# Altium PCB Pixel1.0_3.PcbDoc
Units mm, origin at the board's own origin, x right, y up, seen from the top; angles counter-clockwise.
Board outline 20.31 x 15.2 mm, 2 copper layers (Top, Bottom), stack 1.025 mm thick; 29 components, 19 nets, 125 pads, 25 vias.
Unrouted connection lines stored in the file: 1.
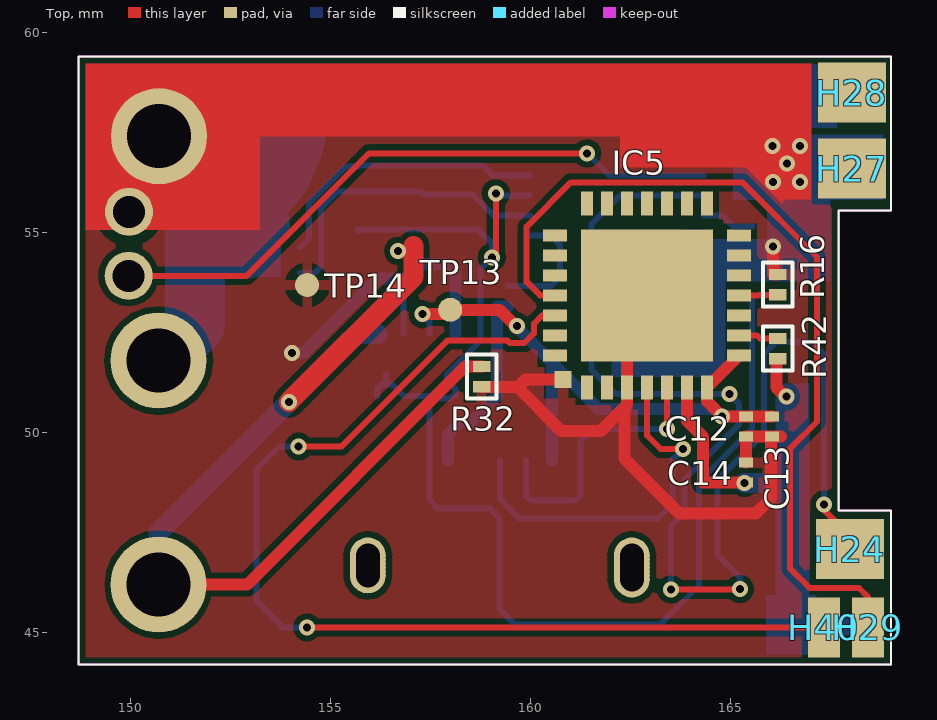
[diagram p0: Top view]
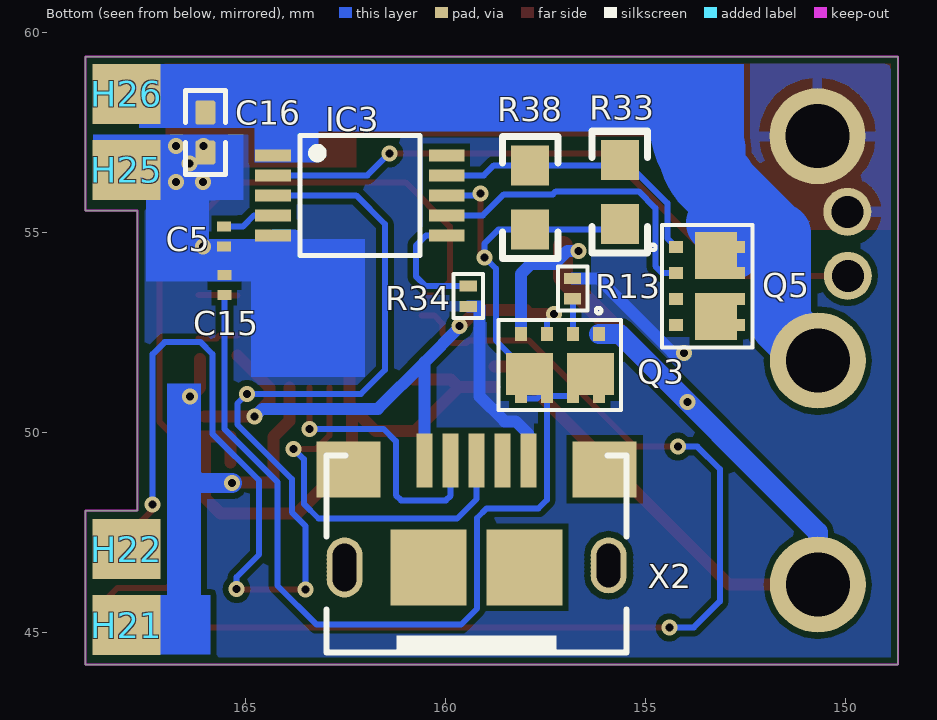
[diagram p1: Bottom view, seen from below]
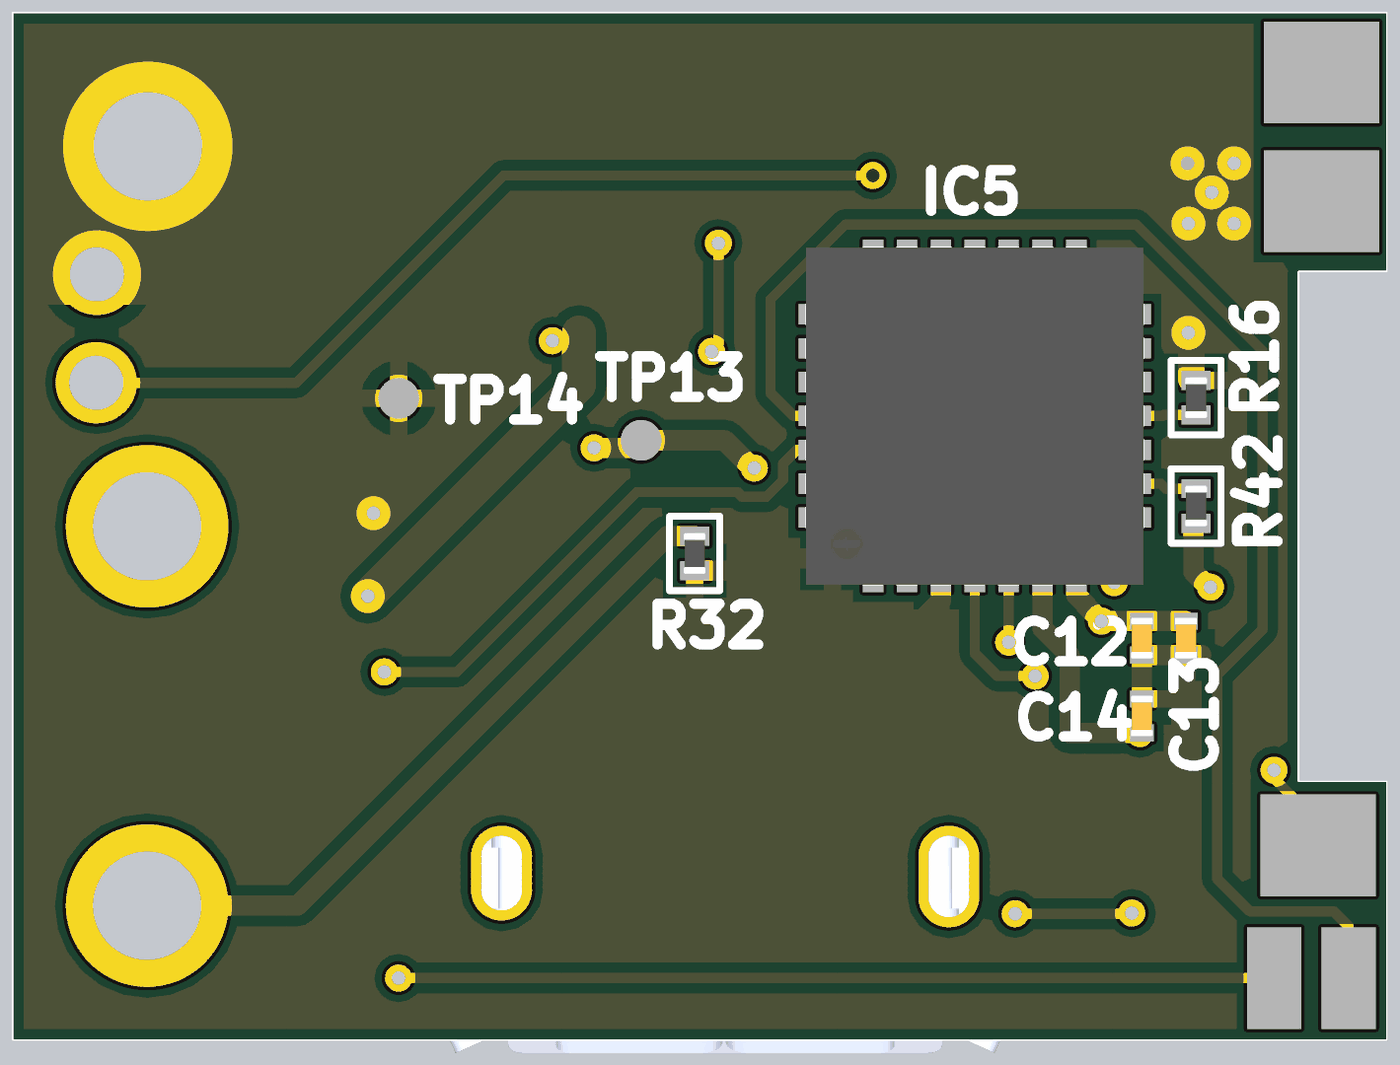
[diagram p2: 3D render of the assembled board from above, using the file's embedded part models]
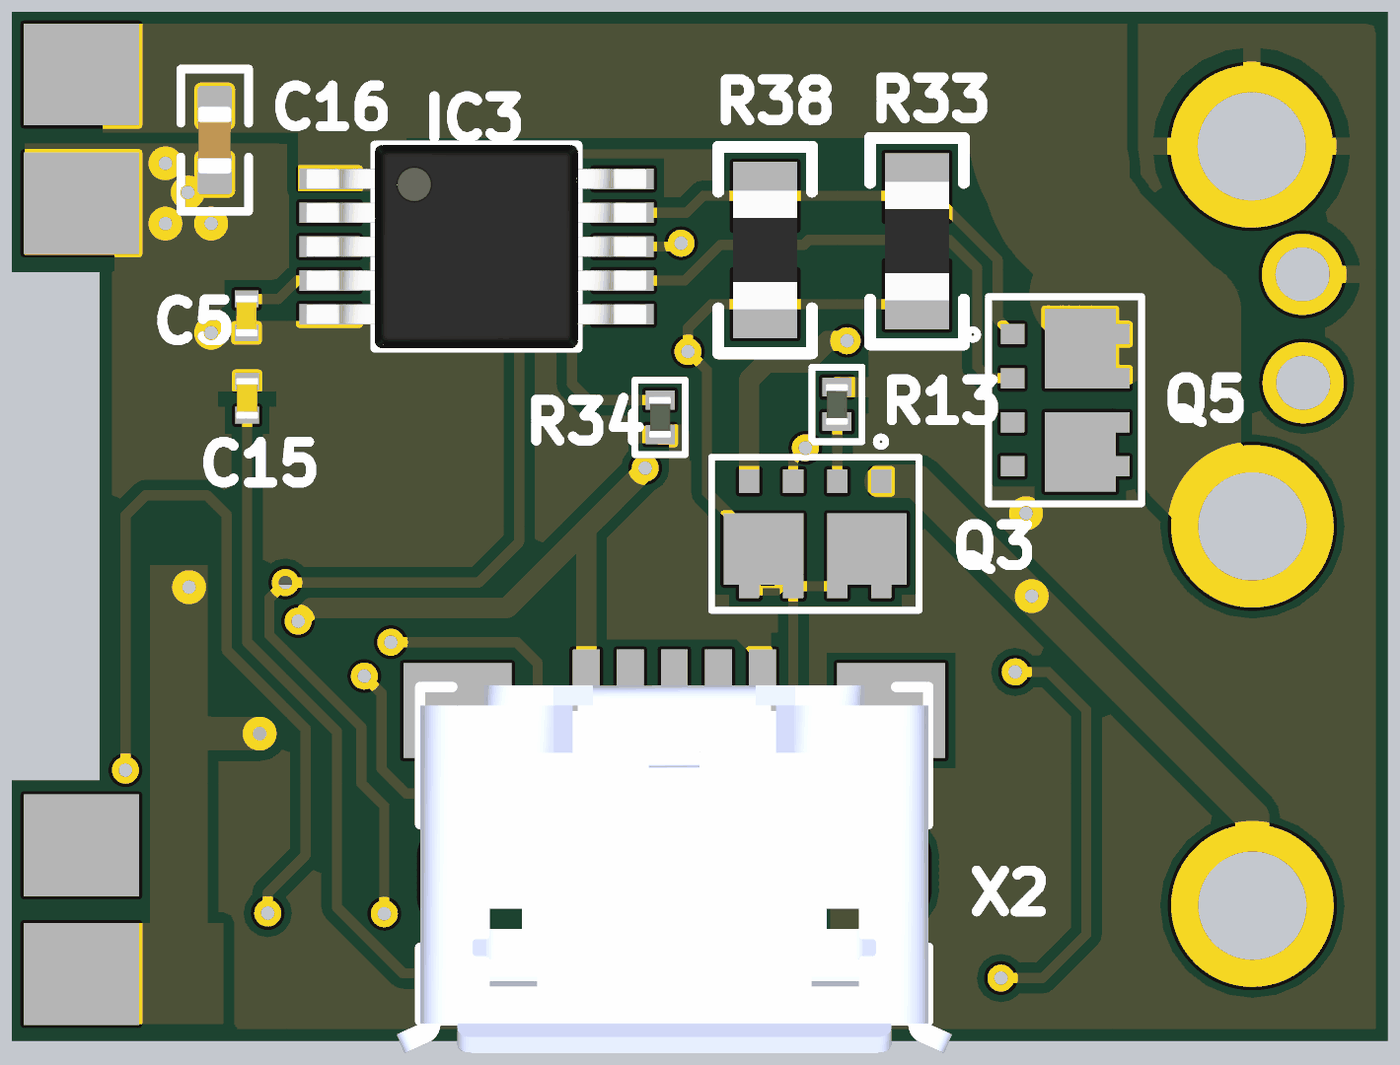
[diagram p3: 3D render of the assembled board from below, using the file's embedded part models]

## Layer stack, top to bottom
Top Solder: solder mask 0.0102, Solder Resist, Dk 3.5
Top: signal copper 0.0356
Dielectric 1: core 0.954, FR-4, Dk 4.2
Bottom: signal copper 0.0356
Bottom Solder: solder mask 0.0102, Solder Resist, Dk 3.5

## Board outline
148.7,44.2 148.7,59.4 169.01,59.4 169.01,55.55 167.71,55.55 167.71,48.05 169.01,48.05 169.01,44.2

## Design rules (kind name [scope] priority, off if disabled: settings)
Clearance [All] p1: gap=0.15
ComponentClearance [All] p1 off: gap=0.2 collisioncheckmode=3 verticalgap=0.15 showdistances=FALSE
HoleSize [All] p1: absolutevalues=TRUE maxlimit=5 minlimit=0.025 maxpercent=80.000 minpercent=20.000
HoleToHoleClearance mdViaViaSameLayer [All] p1: gap=0 allowstackedmicrovias=TRUE
HoleToHoleClearance [All] p2: gap=0 allowstackedmicrovias=TRUE
MinimumSolderMaskSliver [All] p1 off: minsoldermaskwidth=0.254
PolygonConnect ThermalVias [IsVia] p1: connectstyle=Direct reliefconductorwidth=0.254 reliefentries=4 polygonreliefangle="90 Angle" airgapwidth=0.254
PolygonConnect [All] p2: connectstyle=Relief reliefconductorwidth=0.254 reliefentries=4 polygonreliefangle="90 Angle" airgapwidth=0.254
RoutingVias [All] p1: holewidth=0.2 width=0.4 viastyle="Through Hole" minholewidth=0.2 minwidth=0.4 maxholewidth=3 maxwidth=5
ShortCircuit [All] p1 off: allowed=FALSE
SilkToBoardRegionClearance [All] p1 off:
SilkToSilkClearance [All] p1 off: silktosilkclearance=0.254
SilkToSolderMaskClearance [IsPad] p1 off: minsilkscreentomaskgap=0.254 clearancetoexposedcopper=TRUE
SolderMaskExpansion via [isvia] p1: expansion=0 soldermaskfromhole=TRUE
SolderMaskExpansion [All] p2: expansion=0.05
Width Width_2 [InNet('BAT+')] p1: maxlimit=5 minlimit=0.1 preferedwidth=0.3
Width Width_1 [InNet('GND')] p2: maxlimit=5 minlimit=0.1 preferedwidth=0.3
Width [All] p3: maxlimit=5 minlimit=0.1 preferedwidth=0.15
22 further rules are at their usual default settings.

## Classes and differential pairs
component class Pixel1.0_1: C5 C12 C13 C14 C15 C16 IC3 IC5 Q3 Q5 R13 R16 R32 R33 R34 R38 R42 TP13 X2
component class Pixel1.0_2: H21 H22 H24 H25 H26 H27 H28 H29 H40 TP14

## Components (designator, comment, footprint, x,y, rotation, side; value= is the part's Value field where it differs from the comment)
C5 "0.1uF" C0201 165.543,54.908 r270 bottom
C12 "1uF" C0201 165.38,50.15 r270 top
C13 "0.1uF" C0201 166.03,50.15 r270 top
C14 "0.1uF" C0201 165.38,49 r90 top
C15 "1u" C0201 165.534,53.691 r90 bottom
C16 "10u" C0402 166.012,57.503 r270 bottom
H21 "MOUNT-PAD-ROUNDTMOUNT1" T-MOUNT1 167.98,45.19 r270 bottom
H22 "MOUNT-PAD-ROUNDTMOUNT1" T-MOUNT1 167.98,47.09 r90 bottom
H24 "MOUNT-PAD-ROUNDTMOUNT1" T-MOUNT1 167.98,47.09 r90 top
H25 "MOUNT-PAD-ROUNDTMOUNT1" T-MOUNT1 167.98,56.57 r270 bottom
H26 "MOUNT-PAD-ROUNDTMOUNT1" T-MOUNT1 167.98,58.47 r90 bottom
H27 "MOUNT-PAD-ROUNDTMOUNT1" T-MOUNT1 168.03,56.6 r90 top
H28 "MOUNT-PAD-ROUNDTMOUNT1" T-MOUNT1 168.03,58.5 r90 top
H29 "MOUNT-PAD-ROUND1.5MMX1MM" TMOUNT4 168.43,45.13 r90 top
H40 "MOUNT-PAD-ROUND1.5MMX1MM" TMOUNT4 167.33,45.13 r90 top
IC3 "LTC4050" MSOP10 162.15,55.93 r270 bottom
IC5 "CP2102" MLP28 162.913,53.43 r90 top
Q3 "SI5999" 1206-8CHIP-FET 157.15,51.69 r0 bottom
Q5 "SI5999" 1206-8CHIP-FET 153.464,53.661 r270 bottom
R13 "100K" R0201 156.83,53.6 r270 bottom
R16 "10K" R0201 166.18,53.7 r90 top
R32 "100K" R0201 158.78,51.4 r90 top
R33 "0.1Ohm_0.4W" R0603 155.65,56.01 r270 bottom
R34 "19.6K" R0201 159.44,53.41 r90 bottom
R38 "0.1Ohm_0.4W" R0603 157.89,55.88 r270 bottom
R42 "4.7K" R0201 166.18,52.1 r90 top
TP13 "TPTP06R" TP06R 157.99,53.07 r315 top
TP14 "TPTP06R" TP06R 154.413,53.69 r90 top
X2 "MICROUSB-BW/MOUNTHOLE" MICRO_USB_B 159.23,46.63 r180 bottom locked

## Footprints (in the part's own frame and the unit in brackets; to place one, negate y for a bottom-side part, rotate by r counter-clockwise, add the part's x,y. Pads: shape width x height; smd on the part's side, far side on the other; paste and mask are expansions set on the pad)
1206-8CHIP-FET [mm] "1206-8CHIP-FET"
  rect 0.3x0.35 smd: 1(-0.975,-0.775) 2(-0.325,-0.775) 3(0.325,-0.775) 4(0.975,-0.775) 56(0.325,0.775) 56(0.975,0.775) 78(-0.975,0.775) 78(-0.325,0.775)
  rect 1.175x1.05 smd: 56(0.763,0.225) 78(-0.763,0.225)
  silkscreen extent -1.53,-1.43 1.53,1.13, body extent -1.39,-0.82 1.39,0.83, height 0.85
C0201 [mm] "C0201"
  rect 0.25x0.35 smd: 1(-0.25,0) 2(0.25,0)
  body extent -0.36,-0.16 0.36,0.16, height 0.31
C0402 [mm] "C0402"
  round 0.2 on Mech15: 0(0,0)
  rrect20% 0.6x0.5 smd: 1(-0.5,0) 2(0.5,0)
  silkscreen extent -1.05,-0.5 1.05,0.5, body extent -0.5,-0.25 0.5,0.25, height 0.5
MICRO_USB_B [mm] "MICRO_USB_B"
  rect 0.4x1.35 smd: P$1(-1.3,2.675) P$2(-0.65,2.675) P$3(0,2.675) P$4(0.65,2.675) P$5(1.3,2.675)
  rect 1.6x1.4 smd: P$6(-3.2,2.45) P$6(3.2,2.45)
  rect 1.9x1.9 smd: P$7(-1.2,0) P$7(1.2,0)
  round 0.9 hole 0.6: P$8(-3.3,0.3) P$9(-3.3,-0.3) P$12(-3.3,0) P$13(3.3,0) P$14(-3.3,0.2) P$15(-3.3,0.1) P$16(-3.3,-0.1) P$17(-3.3,-0.2) P$18(3.3,0.3) P$19(3.3,0.2) P$20(3.3,0.1) P$21(3.3,-0.2) P$22(3.3,-0.1)
  silkscreen extent -3.75,-2.2 3.75,2.8, body extent -4.1,-2.6 4.1,2.83, height 2.72
MLP28 [mm] "MLP28"
  rect 0.6x0.3 smd: 1(-2.3,1.5) 2(-2.3,1) 3(-2.3,0.5) 4(-2.3,0) 5(-2.3,-0.5) 6(-2.3,-1) 7(-2.3,-1.5) 15(2.3,-1.5) 16(2.3,-1) 17(2.3,-0.5) 18(2.3,0) 19(2.3,0.5) 20(2.3,1) 21(2.3,1.5)
  rect 0.3x0.6 smd: 8(-1.5,-2.3) 9(-1,-2.3) 10(-0.5,-2.3) 11(0,-2.3) 12(0.5,-2.3) 13(1,-2.3) 14(1.5,-2.3) 22(1.5,2.3) 23(1,2.3) 24(0.5,2.3) 25(0,2.3) 26(-0.5,2.3) 27(-1,2.3) 28(-1.5,2.3)
  rect 3.3x3.3 smd: EXP(0,0)
  rect 0.435x0.435 smd: M(-2.103,2.103)
  body extent -2.5,-2.5 2.5,2.5, height 1
MSOP10 [mm] "MSOP10"
  rect 0.305x0.889 smd: 1(-1,-2.17) 2(-0.5,-2.17) 3(0,-2.17) 4(0.5,-2.17) 5(1,-2.17) 6(1,2.17) 7(0.5,2.17) 8(0,2.17) 9(-0.5,2.17) 10(-1,2.17)
  silkscreen extent -1.5,-1.5 1.5,1.5, body extent -1.5,-2.51 1.5,2.51, height 1.05
R0201 [mm] "R0201"
  rect 0.28x0.43 smd: 1(-0.255,0) 2(0.255,0)
  silkscreen extent -0.55,-0.37 0.55,0.37, body extent -0.32,-0.16 0.33,0.16, height 0.24
R0603 [mm] "0603 from SM-752 data"
  rect 1x0.95 smd: 1(-0.8,0) 2(0.8,0)
  silkscreen extent -1.52,-0.69 1.52,0.69, body extent -0.87,-0.47 0.88,0.48, height 0.54
T-MOUNT1 [mm] "T-MOUNT1"
  rect 1.5x1.7 smd: 1(0,0)
TMOUNT4 [mil] "TMOUNT4"
  rect 59.06x31.5 smd: 1(0,0)
TP06R [mm]
  round 0.6 smd: TP(0,0)

## Part data
C5 C12 C13 C14: library part C-EUC0201, "CAPACITOR, European symbol"
C15: library part C-USC0201, "CAPACITOR, American symbol"
C16: library part C-USC0402, "CAPACITOR, American symbol"
H21 H22 H24 H25 H26 H27 H28 H29 H40: "MOUNTING PAD, round"
IC5: library part CP210*, "Single-Chip USB to UART Bridge   Source: www.silabs.com .. CP2101.pdf / cp2102.pdf"
Q3 Q5: "Dual N-Channel 30-V (D-S) MOSFET   Source: http://www.vishay.com/docs/71053/71053.pdf"
R13 R16 R32 R34 R42: library part R-US_R0201, "RESISTOR, American symbol"
R33 R38: library part R-US_R0603, "RESISTOR, American symbol"
TP13 TP14: "Test pad"

## Free pads (board coordinates)
  round 2.4 hole 1.6: 1(150.7,51.8) 2(150.7,46.2) 3(150.71,57.41)
  round 1.2 hole 0.8: 2(149.95,53.92) 2(149.96,55.52)

## Via types
v1: diameter 0.4, hole 0.2, Top to Bottom, 25 vias

## Nets (pads, with @x,y where several pads share a name; then routed paths per layer and width w, separated by ;. In a path a pad name is that pad's centre, name@x,y a point inside that pad or via, vN(x,y) a via of type N, cw(c..) or ccw(c..) an arc to the next point about the centre after c; other vN are vias at no path point)
BAT+: C16.1 H26.1 IC3.1 pad.1 Q5.78 | length 25
  Bottom w0.3: Q5.78@152.689,53.986 152.689,54.36 ; Q5.78@153.239,54.424 153.239,55.234 ; 154.633,58.3 164.14,58.3 ; 163.345,57.09 ccw(c163.345,57.295) 163.49,57.15 ; 163.49,56.93 IC3.1 ; 163.49,57.355 163.495,57.355 ; IC3.1@164.49,56.93 IC3.1 ; H26.1@167.99,58.47 H26.1 166.897,58.47 166.43,58.003 C16.1 164.793,58.003 164.32,57.53 IC3.1
  Bottom w1: 152.689,54.36 Q5.78@152.985,54.36
  Bottom w1.5: pad.1 151.614,52.714 151.614,54.972 151.949,54.972 153.239,56.262 ; 152.689,55.234 153.239,55.234
  Bottom w2: 153.239,56.262 153.51,56.533 153.51,57.101 153.791,57.382 153.791,57.944
DOCK+: pad.2@150.7,46.2 Q3.1 Q3.4 R32.2 | length 28.7
  Top w0.3: pad.2@150.7,46.2 152.914,46.2 158.369,51.655 R32.2
  Top w0.5: v1(153.956,50.77) 157.074,53.887 157.074,54.661
  Bottom w0.15: pad.2@150.7,46.2 pad.2@150.7,47.373
  Bottom w0.3: v1(156.68,54.54) 156.96,54.54 157.28,54.22 157.87,54.22 158.125,53.965 Q3.4
  Bottom w0.5: pad.2@150.7,46.2 150.7,47.51 155.655,52.465 Q3.1
GND: C5.2 C12.2 C13.2 C14.2 C15.2 C16.2 H25.1 IC3.5 IC5.3 IC5.EXP IC5.M pad.2@149.96,55.52 pad.3 R13.1 R16.2 R32.1 R34.1 TP14.TP X2.P$5 | length 33.1
  Top w0.3: pad.3@150.7,57.4 pad.3 ; R32.1 159.69,51.145 159.872,51.327 IC5.M ; 159.665,51.145 160.772,50.038 161.747,50.038 162.345,50.636 ; IC5.EXP 162.413,52.93 IC5.3 162.413,50.704 162.345,50.636 ; C14.2 C12.2 C13.2@166.014,49.9 ; v1(166.065,54.658) 166.065,53.955 R16.2 ; 166.254,49.9 C13.2 C13.2@166.014,49.9 ; 162.345,50.636 162.345,49.353 163.719,47.979 165.632,47.979 166.014,48.362 C13.2@166.014,49.9
  Bottom w0.3: pad.3@150.7,57.4 pad.3@150.933,57.633 ; v1(154.04,51.994) 154.33,51.994 156.192,53.855 R13.1 ; X2.P$5 157.93,49.954 158.256,50.28 158.53,50.28 159.156,50.906 159.156,53.155 R34.1 ; 163.779,54.93 IC3.5 ; C15.2 165.509,53.941 165.509,54.658 C5.2 v1(166.065,54.658) 166.065,56.874 ccw(c165.884,56.874) C16.2 166.776,57.003 H25.1@167.209,56.57 ; H25.1@167.199,56.57 H25.1
  other v1: 166.065,56.27 166.74,56.27 166.41,56.73 166.053,57.16 166.74,57.16
NetC5_1: C5.1 IC3.4 | length 1.3
  Bottom w0.15: IC3.4 164.795,55.43 165.067,55.158 C5.1
NetIC3_6: IC3.6 R34.2 | length 3
  Bottom w0.15: R34.2 160.505,53.665 160.74,53.9 160.74,54.68 160.49,54.93 IC3.6
NetIC3_7: IC3.7 Q5.2 | length 7.7
  Bottom w0.15: Q5.2 154.586,53.986 154.76,54.16 154.76,55.613 155.177,56.03 157.247,56.03 157.322,55.955 158.548,55.955 159.073,55.43 IC3.7
NetIC5_11: IC5.11 R16.1 | length 1
  Top w0.15: IC5.11 165.684,53.43 165.699,53.445 R16.1
NetQ3_2: Q3.2 R13.2 | length 0.9
  Bottom w0.1: R13.2@156.825,53.34 R13.2
  Bottom w0.15: Q3.2 R13.2@156.825,53.34
NTC+: IC3.2 pad.2@149.95,53.92 | length 15.9
  Top w0.15: pad.2@149.95,53.92 152.9,53.92 155.96,56.98 v1(161.41,56.98)
  Bottom w0.15: v1(161.41,56.98) 161.96,56.43 IC3.2
P2_2/DC/!CHARGE: H24.1 IC3.3 | length 31.4
  Top w0.15: v1(163.51,46.08) 165.21,46.08 v1@165.25,46.12 ; v1(167.33,48.2) 167.33,48.076 167.606,47.8 167.606,47.464 H24.1
  Bottom w0.15: v1(163.51,46.08) 163.51,47.67 163.85,48.01 163.85,48.84 165.208,50.198 165.208,50.732 v1(164.97,50.97) 162.12,50.97 161.52,51.57 161.52,55.21 162.24,55.93 IC3.3 ; v1(165.23,46.09) 165.23,46.39 164.67,46.95 164.67,48.806 165.834,49.97 165.834,51.964 166.13,52.26 167.03,52.26 167.33,51.96 v1(167.33,48.2)
PRE2: C15.1 IC3.8 Q3.56 Q3.78 R33.2 R38.2 | length 33.4
  Top w0.15: v1(159.029,54.381) 159.13,54.482 v1(159.13,55.98)
  Bottom w0.15: R33.2@155.69,55.05 155.69,55.08 R38.2 158.68,55.08 159.029,54.731 v1(159.029,54.381) 158.75,54.102 158.75,52.302 157.913,51.465 157.913,51.292 158.125,51.079 158.125,50.915 158.052,50.915 157.988,50.851 157.722,50.851 157.658,50.915 Q3.56@157.475,50.915 ; Q3.78@156.175,50.915 Q3.78@156.175,51.079 ; Q3.78@156.387,51.465 156.387,51.292 Q3.78@156.302,51.206 ; v1(159.13,55.98) 159.18,55.93 IC3.8 ; C15.1 165.534,50.094 164.21,48.77 164.21,46.179 163.231,45.2 159.62,45.2 159.22,45.6 159.22,47.866 158.979,48.108 157.683,48.108 157.475,48.316 Q3.56@157.475,50.915 ; Q3.78@156.175,51.079 156.175,51.105 156.276,51.206 Q3.78@156.302,51.206 ; Q3.78@156.175,51.079 Q3.78@156.302,51.206 ; Q3.78@156.302,51.206 156.534,51.206 156.825,50.915 Q3.56@157.475,50.915
PRE3: IC3.9 Q5.1 R33.1 R38.1 | length 7.2
  Bottom w0.15: Q5.1 154.46,54.857 154.46,55.737 155.373,56.65 R33.1@155.69,56.65 ; R33.1@155.69,56.68 R38.1 158.801,56.68 159.051,56.43 IC3.9
RXD: H29.1 IC5.25 | length 21.8
  Top w0.15: IC5.25 160.24,53.43 159.9,53.77 159.9,55.15 161.005,56.255 165.295,56.255 167.16,54.39 167.16,50.275 166.49,49.605 166.49,46.6 166.975,46.115 168.21,46.115 168.43,45.895 H29.1
TXD: H40.1 IC5.26 | length 27.3
  Top w0.15: v1@154.182,49.632 v1(154.2,49.65) 155.27,49.65 157.925,52.305 159.414,52.305 159.484,52.235 159.836,52.235 160.085,52.484 160.085,52.725 160.29,52.93 IC5.26 ; v1(154.41,45.13) H40.1@167.31,45.13 ; H40.1@167.33,44.806 H40.1
  Bottom w0.15: v1(154.2,49.65) 153.71,49.65 153.15,49.09 153.15,45.78 153.8,45.13 v1(154.41,45.13)
USB5V: C12.1 C13.1 IC5.7 IC5.8 Q3.3 TP13.TP X2.P$1 | length 14.9
  Top w0.15: TP13.TP@157.879,52.959 TP13.TP
  Top w0.3: v1(157.296,52.959) TP13.TP@157.879,52.959 ; TP13.TP 159.223,53.07 159.633,52.66 v1(159.66,52.66) ; IC5.8 IC5.7 164.414,50.782 v1(164.782,50.4) C12.1 C13.1
  Bottom w0.15: v1(157.296,52.959) 157.475,52.78 Q3.3
  Bottom w0.3: v1(159.66,52.66) 159.66,52.634 160.53,51.763 ; X2.P$1 160.53,51.763 ; v1(164.782,50.4) 164.587,50.595 161.698,50.595 160.53,51.763
USB+: IC5.4 X2.P$3 | length 9.3
  Top w0.15: IC5.4 162.913,49.927 163.251,49.589 v1(163.805,49.589)
  Bottom w0.15: X2.P$3 159.23,48.339 159.715,47.854 163.184,47.854 163.55,48.22 163.55,49.335 v1(163.805,49.589)
USB-: IC5.5 X2.P$2 | length 7
  Top w0.15: v1(163.414,50.089) IC5.5
  Bottom w0.15: X2.P$2 159.88,48.425 159.998,48.308 161.118,48.308 161.248,48.438 161.248,49.785 161.552,50.089 v1(163.414,50.089)
USBRESET: IC5.9 R42.2 | length 1
  Top w0.15: IC5.9 165.659,52.43 165.734,52.355 R42.2
VDD: C14.1 H21.1 IC5.6 R42.1 | length 12.3
  Top w0.15: R42.1@166.141,51.845 R42.1
  Top w0.3: IC5.6 163.913,50.29 164.313,49.891 164.313,48.75 C14.1 ; R42.1@166.141,51.845 166.141,51.129 v1@166.37,50.9
  Bottom w0.5: v1(165.35,48.74) 166.131,48.74 166.141,48.75 ; 166.47,50.573 166.47,45.35 166.63,45.19 ; 166.62,45.19 H21.1
  other v1: 166.391,50.902
pads on no net: C16.0 H22.1 H27.1 H28.1 IC3.10 IC5.1 IC5.2 IC5.10 IC5.12 IC5.13 IC5.14 IC5.15 IC5.16 IC5.17 IC5.18 IC5.19 IC5.20 IC5.21 IC5.22 IC5.23 IC5.24 IC5.27 IC5.28 Q5.3 Q5.4 Q5.56 X2.P$4 X2.P$6 X2.P$7 X2.P$8 X2.P$9 X2.P$12 X2.P$13 X2.P$14 X2.P$15 X2.P$16 X2.P$17 X2.P$18 X2.P$19 X2.P$20 X2.P$21 X2.P$22

## Polygon pours and split planes (outlines as drawn)
GND on Top "Top-No Net" (solid, remove dead copper, pour order 6): 148.7,59.4 169.01,59.4 169.01,55.55 167.71,55.55 167.71,48.05 169.01,48.05 169.01,44.2 148.7,44.2 148.7,59.4
GND on Bottom "Bottom_GND" (solid, remove dead copper, pour order 10): 148.7,59.4 148.91,59.19 149.12,59.4 169.01,59.4 169.01,55.55 167.71,55.55 167.71,48.05 169.01,48.05 169.01,44.2 148.7,44.2 148.7,59.4

## Keep-outs
Keep-Out Layer:
  the board outline again, w0.051

## Other copper
Top:
  region net GND: 148.879,55.069 153.23,55.069 153.23,57.41 160.64,57.41 161.43,57.41 162.24,57.41 162.24,56.63 165.378,56.63 166.278,55.73 166.378,55.83 167,55.83 167,59.191 167.03,59.221 148.879,59.221
Bottom:
  rectangle net BAT+: 163.184,56.75 164.782,59.22
  rectangle net BAT+: 163.92,57.61 167.67,59.22
  rectangle net GND: 165.06,55.81 168.82,57.45
  rectangle net VDD: 165.884,44.45 167.15,45.94
  rectangle net VDD: 166.12,44.45 166.97,51.23
  rectangle net BAT+: 152.55,53.9 153.76,59.14
  rectangle net BAT+: 152.55,57.53 163.92,59.22
  region net BAT+: 150.91,55.27 152.55,56.91 152.55,57.53 154.84,57.53 154.89,57.48 cw(c152.463,57.729) 154.61,56.57 cw(c152.393,57.245) 154.183,55.773 153.71,55.3 150.9,55.29
  region net BAT+: 153.76,55.43 154.48,56.26 154.48,56.91 154.87,57.3 154.87,59.19 152.6,59.19 152.55,59.14 152.55,53.9 153.76,53.9 153.74,53.92 153.74,54.92
  region net GND: 167.49,55.81 165.93,55.86 165.93,54.83 165.32,54.83 162.03,54.83 162.03,51.4 164.86,51.4 164.86,53.79 167.49,53.79 167.49,55.86 165.76,55.81

## Silkscreen, mask and mechanical layers (free items; w line width, h text height)
Top Overlay:
  the board outline again, w0.051
Mechanical 5:
  text "C" at 167.9,57.3 h0.52